# EAGLE board MCU (EAGLE 9.1.3)
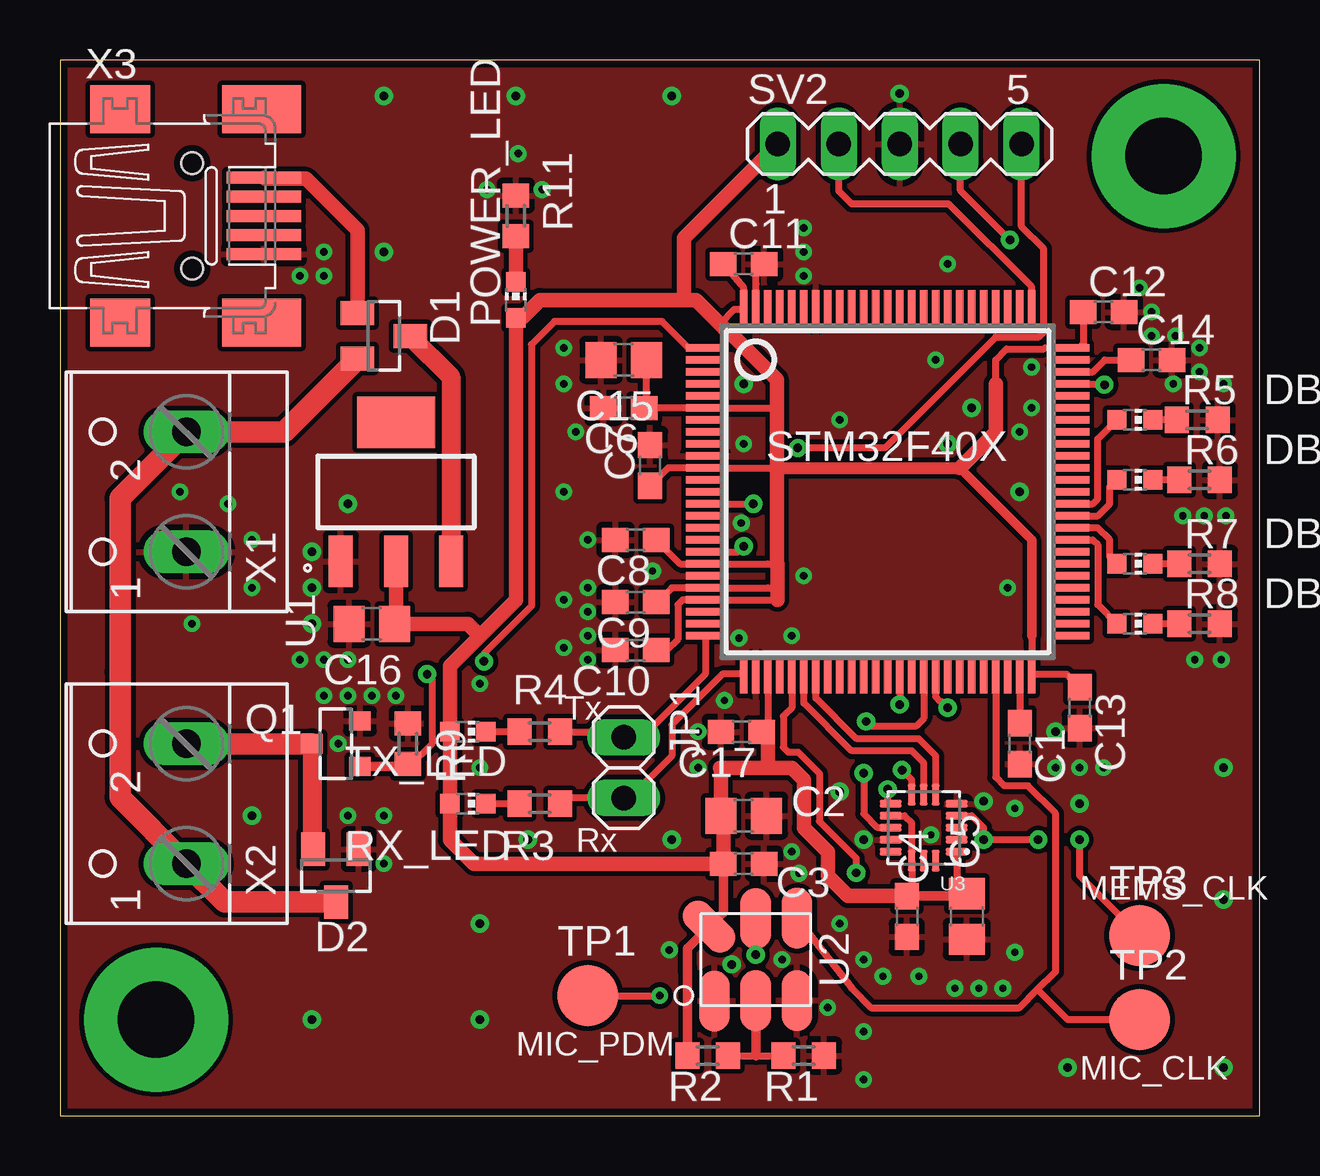
[diagram p0: board, top side]
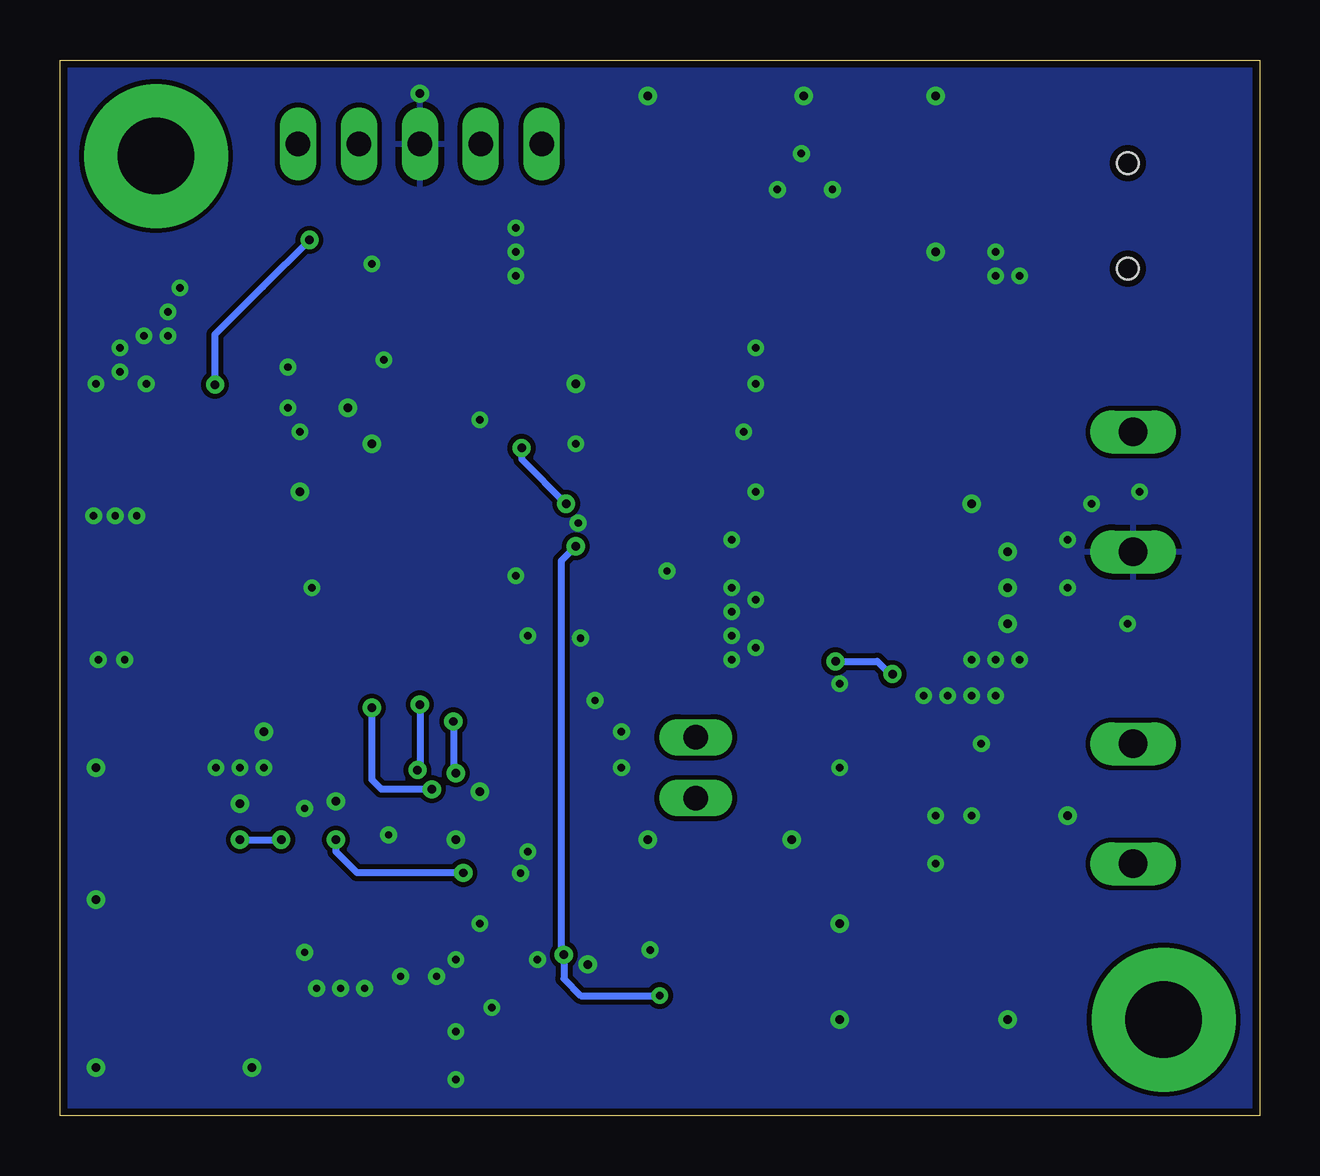
[diagram p1: board, bottom side, seen from below]

Size 50 x 44 mm. Coordinates in mm from the lower left corner, seen from the top.
Outline: 0,0 50,0 50,44 0,44 0,0
Copper layers (1*16): Top 0.035mm / dielectric 1.5mm / Bottom 0.035mm
Design rules "default *": minimum track width 0.2mm, minimum drill 0.3mm, track to track 0.2mm, track to pad 0.2mm, pad to pad 0.2mm, via to via 0.2mm, smd to smd 0mil, copper to edge 0.3mm, drill to drill 6mil, minimum pad ring 10mil, minimum via ring 8mil, stop-mask expansion 4mil, vias tented up to drill 0mil, thermal gap 10mil

## Footprints (pad centres in the part's own frame; a part is rotated, then mirrored left to right if it is on the bottom)
C0603 = smd 1.1 x 1: 1 -0.85,0; 2 0.85,0
C0805 = smd 1.3 x 1.5: 1 -0.95,0; 2 0.95,0
SOT23 = smd 1 x 1.4: 1 -0.95,-1.1; 2 0.95,-1.1; 3 0,1.1
CHIP-LED0603 = smd 0.8 x 0.8: A 0,-0.75; C 0,0.75
1X02 = drill 1.016 long: 1 -1.27,0; 2 1.27,0
SOT23' = smd 0.8 x 0.9: 1 -0.95,-1; 2 0.95,-1; 3 0,1
R0603 = smd 1 x 1.1: 1 -0.85,0; 2 0.85,0
MA05-1 = drill 1.016 long: 1 -5.08,0; 2 -2.54,0; 3 0,0; 4 2.54,0; 5 5.08,0
B2,54 = smd 2.54 x 2.54: TP 0,0
SOT230P700X180-4N = smd 2.15 x 1: 1 -2.9,2.3; 2 -2.9,0; 3 -2.9,-2.3 | smd 2.15 x 3.25: 4 2.9,0
ST_HLGA6 = smd 2.54 x 1.27: 1 -1.727,1.721; 2 -1.708,0; 3 -1.708,-1.727; 4 1.727,-1.721; 5 1.708,0 | smd 2.54 x 1.27 rotated 45: 6 1.373,1.948
LGA16R50P5X3_300X300X100N = smd 0.9 x 0.31: 1 -1.375,1; 2 -1.375,0.5; 3 -1.375,0; 4 -1.375,-0.5; 5 -1.375,-1; 9 1.375,-1; 10 1.375,-0.5; 11 1.375,0; 12 1.375,0.5; 13 1.375,1 | smd 0.31 x 0.9: 6 -0.5,-1.375; 7 0,-1.375; 8 0.5,-1.375; 14 0.5,1.375; 15 0,1.375; 16 -0.5,1.375
LQFP100 = smd 1.6 x 0.3: 1 -7.6,6; 2 -7.6,5.5; 3 -7.6,5; 4 -7.6,4.5; 5 -7.6,4; 6 -7.6,3.5; 7 -7.6,3; 8 -7.6,2.5; 9 -7.6,2; 10 -7.6,1.5; 11 -7.6,1; 12 -7.6,0.5; 13 -7.6,0; 14 -7.6,-0.5; 15 -7.6,-1; 16 -7.6,-1.5; 17 -7.6,-2; 18 -7.6,-2.5; 19 -7.6,-3; 20 -7.6,-3.5; 21 -7.6,-4; 22 -7.6,-4.5; 23 -7.6,-5; 24 -7.6,-5.5; 25 -7.6,-6; 51 7.6,-6; 52 7.6,-5.5; 53 7.6,-5; 54 7.6,-4.5; 55 7.6,-4; 56 7.6,-3.5; 57 7.6,-3; 58 7.6,-2.5; 59 7.6,-2; 60 7.6,-1.5; 61 7.6,-1; 62 7.6,-0.5; 63 7.6,0; 64 7.6,0.5; 65 7.6,1; 66 7.6,1.5; 67 7.6,2; 68 7.6,2.5; 69 7.6,3; 70 7.6,3.5; 71 7.6,4; 72 7.6,4.5; 73 7.6,5; 74 7.6,5.5; 75 7.6,6 | smd 0.3 x 1.6: 26 -6,-7.6; 27 -5.5,-7.6; 28 -5,-7.6; 29 -4.5,-7.6; 30 -4,-7.6; 31 -3.5,-7.6; 32 -3,-7.6; 33 -2.5,-7.6; 34 -2,-7.6; 35 -1.5,-7.6; 36 -1,-7.6; 37 -0.5,-7.6; 38 0,-7.6; 39 0.5,-7.6; 40 1,-7.6; 41 1.5,-7.6; 42 2,-7.6; 43 2.5,-7.6; 44 3,-7.6; 45 3.5,-7.6; 46 4,-7.6; 47 4.5,-7.6; 48 5,-7.6; 49 5.5,-7.6; 50 6,-7.6; 76 6,7.6; 77 5.5,7.6; 78 5,7.6; 79 4.5,7.6; 80 4,7.6; 81 3.5,7.6; 82 3,7.6; 83 2.5,7.6; 84 2,7.6; 85 1.5,7.6; 86 1,7.6; 87 0.5,7.6; 88 0,7.6; 89 -0.5,7.6; 90 -1,7.6; 91 -1.5,7.6; 92 -2,7.6; 93 -2.5,7.6; 94 -3,7.6; 95 -3.5,7.6; 96 -4,7.6; 97 -4.5,7.6; 98 -5,7.6; 99 -5.5,7.6; 100 -6,7.6
W237-102 = drill 1.194 long: 1 -2.5,-1.27; 2 2.5,-1.27
32005-201 = smd 3.1 x 0.5: 1 3,1.6; 2 3,0.8; 3 3,0; 4 3,-0.8; 5 3,-1.6 | smd 2.5 x 2: M1 -3,-4.45; M2 -3,4.45 | smd 3.3 x 2: M3 2.9,4.45; M4 2.9,-4.45 | hole 0.9: 0,2.2; 0,-2.2

## Placement (x,y rotation side)
C1  2.2uF  [C0603]  40,15.5 270 top
C2  10uF  [C0805]  28.5,12.5 180 top
C3  100nF  [C0603]  28.5,10.5 180 top
C4  100nF  [C0603]  35.3,8.3 270 top
C5  10uF  [C0805]  37.8,8.3 270 top
C6  100nF  [C0603]  23.5,29.5 180 top
C7  100nF  [C0603]  24.6,27.1 90 top
C8  100nF  [C0603]  24,24 180 top
C9  100nF  [C0603]  24,21.4 180 top
C10  100nF  [C0603]  24,19.4 180 top
C11  100nF  [C0603]  28.5,35.5 0 top
C12  100nF  [C0603]  43.5,33.5 0 top
C13  100nF  [C0603]  42.5,17 270 top
C14  2.2uF  [C0603]  45.5,31.5 0 top
C15  10uF  [C0805]  23.5,31.5 180 top
C16  10uF  [C0805]  13,20.5 180 top
C17  100nF  [C0603]  28.4,16 180 top
D1  BAT54C  [SOT23]  13.5,32.5 270 top
D2  BAT54C  [SOT23]  11.5,10 180 top
DBG_LED1  [CHIP-LED0603]  44.8,20.5 270 top
DBG_LED2  [CHIP-LED0603]  44.8,23 270 top
DBG_LED3  [CHIP-LED0603]  44.8,26.5 270 top
DBG_LED4  [CHIP-LED0603]  44.8,29 270 top
JP1  [1X02]  23.5,14.5 90 top
POWER_LED  [CHIP-LED0603]  19,34 0 top
Q1  IRLML6346  [SOT23']  11.5,15.5 90 top
R1  0  [R0603]  31,2.5 180 top
R2  0  [R0603]  27,2.5 180 top
R3  330  [R0603]  20,13 0 top
R4  330  [R0603]  20,16 0 top
R5  330  [R0603]  47.4,29 0 top
R6  330  [R0603]  47.5,26.5 0 top
R7  330  [R0603]  47.5,23 0 top
R8  330  [R0603]  47.5,20.5 0 top
R9  10k  [R0603]  14.5,15.5 270 top
R11  330  [R0603]  19,37.5 90 top
RX_LED  [CHIP-LED0603]  17,13 270 top
SV2  [MA05-1]  35,40.5 0 top
TP1  TPB2,54  [B2,54]  22,5 0 top
TP2  TPB2,54  [B2,54]  45,4 0 top
TP3  TPB2,54  [B2,54]  45,7.5 0 top
TX_LED  [CHIP-LED0603]  17,16 270 top
U1  LD1117S33TR  [SOT230P700X180-4N]  14,26 90 top
U2  MP45DT02  [ST_HLGA6]  29,6.5 90 top
U3  LIS3DSHTR  [LGA16R50P5X3_300X300X100N]  36,12 180 top
U$1  STM32F407STM32D40X  [LQFP100]  34.5,26 0 top
X1  [W237-102]  4,26 90 top
X2  [W237-102]  4,13 90 top
X3  MINI-USB-32005-201  [32005-201]  5.5,37.5 0 top

## Library data of the parts
C1-C17 R1-R9 R11 = resistor
D1 D2 = diode
DBG_LED1-DBG_LED4 POWER_LED RX_LED TX_LED = led
JP1 = pinhead
Q1 = bss138_10; MF: Fairchild; MPN: BSS138; OC_FARNELL: 9845330; OC_NEWARK: 67R2009
SV2 = con-lstb; OC_FARNELL: unknown; OC_NEWARK: unknown
TP1-TP3 = testpad
U1 = LD1117S33TR; AVAILABILITY: Unavailable; DESCRIPTION: LD1117 Series 1300 mA 3.3 V Fixed Output Positive Voltage LDO Regulator- SOT-223; MF: STMicroelectronics; MP: LD1117S33TR; PACKAGE: SOT-223 STMicroelectronics; PRICE: None
U2 = MP45DT02; AVAILABILITY: Unavailable; DESCRIPTION: Mic Omni-Directional -26dB 3.6V Rectangular Solder Pad; MF: STMicroelectronics; MP: MP45DT02; PACKAGE: PDIP-18 STMicroelectronics; PRICE: None
U3 = LIS3DSHTR; AVAILABILITY: Unavailable; DESCRIPTION: MEMS digital output motion sensor: ultra low-power high performance 3-axes nano accelerometer; MF: STMicroelectronics; MP: LIS3DSHTR; PACKAGE: LGA-16 STMicroelectronics; PRICE: None
U$1 = stm32f
X1 X2 = con-wago-500; MPN: 237-102; OC_FARNELL: unknown; OC_NEWARK: 70K9898
X3 = con-cypressindustries; OC_FARNELL: unknown; OC_NEWARK: unknown

## Nets
+5V: D1.1 X3.1
+12V: D1.2 D2.3 X1.2 X2.1
DBG_LED1: DBG_LED1.A U$1.59
DBG_LED2: DBG_LED2.A U$1.60
DBG_LED3: DBG_LED3.A U$1.61
DBG_LED4: DBG_LED4.A U$1.62
GND: C1.2 C2.1 C3.1 C4.2 C5.2 C6.2 C7.2 C8.2 C9.2 C10.2 C11.2 C12.2 C13.2 C14.2 C15.2 C16.2 C17.2 D2.1 Q1.2 R1.1 R5.2 R6.2 R7.2 R8.2 R9.1 R11.2 SV2.3 U1.1 U2.1 U2.3 U3.5 U3.12 U$1.10 U$1.20 U$1.27 U$1.74 U$1.94 U$1.99 X1.1 X3.5
MEMS_INT1: U3.11 U$1.41
MEMS_INT2: U3.9 U$1.42
MEMS_MISO: U3.7 U$1.31
MEMS_MOSI: U3.6 U$1.32
MEMS_NCS: U3.8 U$1.39
MEMS_SCK: TP3.TP U3.4 U$1.30
MIC_CLK: TP2.TP U2.4 U$1.47
MIC_PDM: TP1.TP U2.5 U$1.18
MOSFET_GATE: Q1.1 R9.2 U$1.1
N$1: POWER_LED.C R11.1
N$2: C14.1 U$1.73
N$3: R1.2 R2.1 U2.2
N$4: R3.1 RX_LED.C
N$5: C1.1 U$1.49
N$6: D1.3 U1.3
N$7: R4.1 TX_LED.C
N$9: DBG_LED4.C R5.1
N$10: DBG_LED3.C R6.1
N$11: DBG_LED2.C R7.1
N$12: DBG_LED1.C R8.1
N$13: D2.2 Q1.3 X2.2
NRST: SV2.5 U$1.14
SWCLK: SV2.2 U$1.76
SWDIO: SV2.4 U$1.72
USART2_RX: JP1.1 R3.2 U$1.26
USART2_TX: JP1.2 R4.2 U$1.25
VDD: C2.2 C3.2 C4.1 C5.1 C6.1 C7.1 C8.1 C9.1 C10.1 C11.1 C12.1 C13.1 C15.1 C16.1 C17.1 POWER_LED.A R2.2 RX_LED.A SV2.1 TX_LED.A U1.2 U2.6 U3.1 U3.10 U3.14 U$1.6 U$1.11 U$1.19 U$1.21 U$1.22 U$1.28 U$1.50 U$1.75 U$1.100

## Tracks (layer width: path | path; a pad name or v marks a point on that pad's centre or on a via)
+5V
  Top 0.6: X3.1 8.55,39.05 10.26,39.05 12.4,36.91 D1.1
+12V
  Top 0.9: D2.3 6.87,8.9 X2.1 2.5,13.27 2.5,18.5 2.5,25.73 X1.2 9.35,28.5 D1.2
DBG_LED1
  Top 0.3: U$1.59 43.05,24 43.25,23.8 43.25,21.3 DBG_LED1.A
DBG_LED2
  Top 0.3: DBG_LED2.A 43.75,23.3 43.75,24 43.25,24.5 U$1.60
DBG_LED3
  Top 0.3: DBG_LED3.A 43.75,26.2 43.75,25.5 43.25,25 U$1.61
DBG_LED4
  Top 0.3: U$1.62 43.05,25.5 43.25,25.7 43.25,28.2 DBG_LED4.A
GND  (via drill 0.3, 0.35)
  Top 0.3: C11.2 29,35.15 29,34.68 29.02,34.67 29,34.48 U$1.99
  other vias: 11,36 11,35 10,35 10,19 11,19 12,19 14,17.5 13,17.5 12,17.5 11,17.5 11.6,15.5 17.5,18 17.5,14.5 21,19.5 21,26 22,24 24.7,22.7 22,22 22,21 21,21.5 22,20 22,19 28.5,28 25.4,6.9 30.1,6.5 32,4.5 33.5,6.5 33.5,3.5 33.5,1.5 34.3,5.8 35.8,5.8 37.3,5.3 38.3,5.3 39.3,5.3 39.8,6.8 41.5,14.5 42.5,14.5 43.5,14.5 27.7,17.3 26.6,16 26.6,14.5 21,30.5 21,32 21.5,28.5 31,35 31,36 31,37 45,34.5 45.5,33.5 45.5,32.5 46.5,32.5 47.5,32 47.5,31 46.4,30.5 48.4,19 47.3,19 48.6,25 46.8,25 47.7,25 48.5,30.5 12,12.5 13.5,12.5 13.5,10.5 7,25.5 8,24 8,22 5.5,20.5 5,26 17.8,38.6 19.1,40.1 20.1,38.6 36.3,11.7 40.5,31.2 40.5,29.5 40,28.5 39.5,22 28.4,24.7 28.3,19.9 30.5,20 31,22.5 32.5,29 36.5,31.5 39.8,12.8 37,35.5 30.5,11 30.8,10.1 32.5,8 33.5,11.5 38.5,13.1 35,42.6 10.5,22 10.5,23.5 10.5,20.5 41.5,16 42.5,13 10.5,4 17.5,4 42,2 48.5,2 48.5,9 48.5,14.5 25.5,42.5 19,42.5 13.5,42.5 13.5,36 17.5,8 28,6.3 38,29.5 37,28 28.5,30.5 40,26 32.5,13.5 25.5,11.5 19.5,11.5 12,25.5 8,12.5
  pour Top: 0,0 50,0 50,44 0,44
  pour Bottom: 0,44 50,44 50,0 0,0
MEMS_INT1  (via drill 0.35)
  Top 0.3: U$1.41 36,16.55 35.67,16.23 33.8,16.23 v33.6,16.43 | v33.5,14.27 33.5,12.57 34.07,12 U3.11
  Bottom 0.3: v33.6,16.43 33.6,14.37 v33.5,14.27
MEMS_INT2  (via drill 0.35)
  Top 0.3: U3.9 34.5,13.12 v34.5,13.6 | U$1.42 36.5,17.45 36.7,17.25 36.75,17.25 v37,17
  Bottom 0.3: v34.5,13.6 36.6,13.6 37,14 v37,17
MEMS_MISO
  Top 0.3: U3.7 36,14.7 35.5,15.2 32.99,15.2 31,17.19 U$1.31
MEMS_MOSI
  Top 0.3: U3.6 36.5,15 35.8,15.7 33.2,15.7 31.5,17.4 U$1.32
MEMS_NCS  (via drill 0.35)
  Top 0.3: U3.8 35.5,14 v35.1,14.4 | U$1.39 v35,17.13
  Bottom 0.3: v35,17.13 35,14.5 v35.1,14.4
MEMS_SCK  (via drill 0.35)
  Top 0.3: U3.4 38,12.5 38.5,12 v38.5,11.5 v40.77,11.5 | U$1.30 30.5,17 30.15,16.65 30.15,15.35 30.35,15.15 30.77,15.15 31.65,14.27 31.65,12.27 33.19,10.73 v33.19,10.12 | TP3.TP 42.5,10 v42.5,11.5
  Bottom 0.3: v33.19,10.12 37.62,10.12 38.5,11 v38.5,11.5 | v42.5,11.5 v40.77,11.5
MIC_CLK
  Top 0.3: U2.4 33,5.3 33.8,4.5 39.99,4.5 40.75,5.25 | 40.75,5.25 41.5,6.01 41.5,12.59 40.34,13.75 39.35,13.75 39,14.11 U$1.47 | TP2.TP 42,4 40.75,5.25
MIC_PDM  (via drill 0.3, 0.35)
  Top 0.3: U2.5 v29,6.7 | U$1.18 28.27,23.5 v28.5,23.73 | TP1.TP v25,5
  Bottom 0.3: v28.5,23.73 29.1,23.13 29.1,6.8 v29,6.7 29,5.7 28.3,5 v25,5
MOSFET_GATE  (via drill 0.35)
  Top 0.3: 14.5,14.55 14.55,14.5 14.55,14.55 15.5,15.5 15.5,18.2 v15.3,18.4 | v17.67,18.93 17.67,19.25 19.65,21.23 19.65,32.14 20.61,33.1 25.1,33.1 26.2,32 U$1.1
  Top 0.4: Q1.1 14.5,14.55 R9.2
  Bottom 0.3: v15.3,18.4 15.4,18.4 15.93,18.93 v17.67,18.93
N$1
  Top 0.6: POWER_LED.C R11.1
N$2
  Top 0.3: C14.1 43.55,31.5 43.05,31 U$1.73
N$3
  Top 0.3: R2.1 29,2.5 R1.2
  Top 0.4: U2.2 29,3 29,2.5
N$4
  Top 0.3: R3.1 RX_LED.C
N$5
  Top 0.3: U$1.49 C1.1
N$6
  Top 0.8: D1.3 16.3,30.8 U1.3
N$7
  Top 0.3: R4.1 TX_LED.C
N$8  (via drill 3.2 pad 6)
  other vias: 4,4
N$9
  Top 0.3: R5.1 DBG_LED4.C
N$10
  Top 0.3: R6.1 DBG_LED3.C
N$11
  Top 0.3: R7.1 DBG_LED2.C
N$12
  Top 0.3: R8.1 DBG_LED1.C
N$13
  Top 0.8: Q1.3 10.5,11.15 D2.2
  Top 0.9: X2.2 Q1.3
N$14  (via drill 3.2 pad 6)
  other vias: 46,40
NRST  (via drill 0.35)
  Top 0.3: U$1.14 v28.9,25.5 | SV2.5 40.08,37.05 41,36.13 41,32.66 40.8,32.45 39,32.45 34.38,27.83 v30.76,27.83
  Bottom 0.3: v30.76,27.83 30.76,27.36 v28.9,25.5
SWCLK
  Top 0.3: U$1.76 40.5,34.55 37.05,38 33,38 32.46,38.54 SV2.2
SWDIO  (via drill 0.35)
  Top 0.3: v43.54,30.46 arc90 43.5,30.5 U$1.72 | v39.6,36.5 37.54,38.56 SV2.4
  Bottom 0.3: v43.54,30.46 43.54,32.56 41.55,34.55 v39.6,36.5
USART2_RX
  Top 0.3: R3.2 21.08,13.23 JP1.1 23.73,13.23 25.5,15 25.5,16.29 27.61,18.4 U$1.26
USART2_TX
  Top 0.3: R4.2 23.27,16 JP1.2 24.27,15.77 26.9,18.4 U$1.25
VDD
  Top 0.3: 37.8,9.15 C5.1 | C9.1 24.9,21.4 25.5,22 U$1.21 29.5,22 29.9,22 | U$1.28 29.5,16.25 | C11.1 28.5,34.5 U$1.100 28.1,33.6 27.5,33 | 29.9,21.5 U$1.22 25.95,21.5 25.75,21.3 25.75,19.85 25.3,19.4 C10.1 | 29.5,23 29.88,23 | 29.88,27 U$1.11 25.35,27 C7.1 | 29.88,29.5 U$1.6 C6.1 24.45,29.6 C15.1 | C12.1 42.65,32.15 42.5,32 U$1.75 41.05,32 41,31.95 39.45,31.95 39,31.5 39,30.5 | 40.5,20 U$1.50 41.95,18.4 C13.1 | C8.1 25.85,23 U$1.19 29.5,23 | C3.2 | 35.5,9.15 U3.14 35.5,12.2 35.2,12.5 U3.10 | U3.1 37.38,9.53 37,9.15 | 29.5,23 29.9,23
  Top 0.4: C4.1 35.5,9.15 37,9.15 37.8,9.15 | 29.5,16.25 C17.1 | 37.5,27 40.5,24 40.5,20 | 26.15,6.25 26.15,6 | 26.15,6 R2.2 | 26.15,6 26.15,6.58 26.15,6.59 26.15,6.97 U2.6 27.65,8.47 C3.2
  Top 0.5: 29.88,27 37.5,27
  Top 0.6: 26,34 26.5,34 27.5,33 27.85,32.65 27.91,32.65 29.88,30.68 29.88,29.5 29.88,27 29.88,23 | 29.9,21.5 29.9,22 29.9,23 | 29.5,14.5 29,14.5 27.5,14.5 27.55,14.45 C2.2 27.65,12.4 C3.2 17.25,10.5 16.25,11.5 RX_LED.A TX_LED.A 16.25,18.75 17.5,20 | C17.1 29.5,15.75 29.5,14.5 | 26,34 26,36.58 SV2.1 | 17.5,20 19,21.5 19,30 POWER_LED.A 19.25,33.25 20,34 26,34 | U1.2 14,20.55 C16.1 17,20.5 17.5,20 | 29.5,14.5 30.5,14.5 31,14 31,12 32,11 32,10 32.85,9.15 C4.1 | 37.5,27 39,28.5 39,30.5

## Text on the board
tPlace: Tx | Rx | MEMS_CLK | MIC_PDM | MIC_CLK